# Altium PCB APM32F103VET6核心板PCB图纸.PcbDoc
Units mil, origin at the board's own origin, x right, y up, seen from the top; angles counter-clockwise.
Board outline 2600 x 1600 mil, 2 copper layers (Top Layer, Bottom Layer); 35 components, 94 nets, 269 pads, 0 vias.
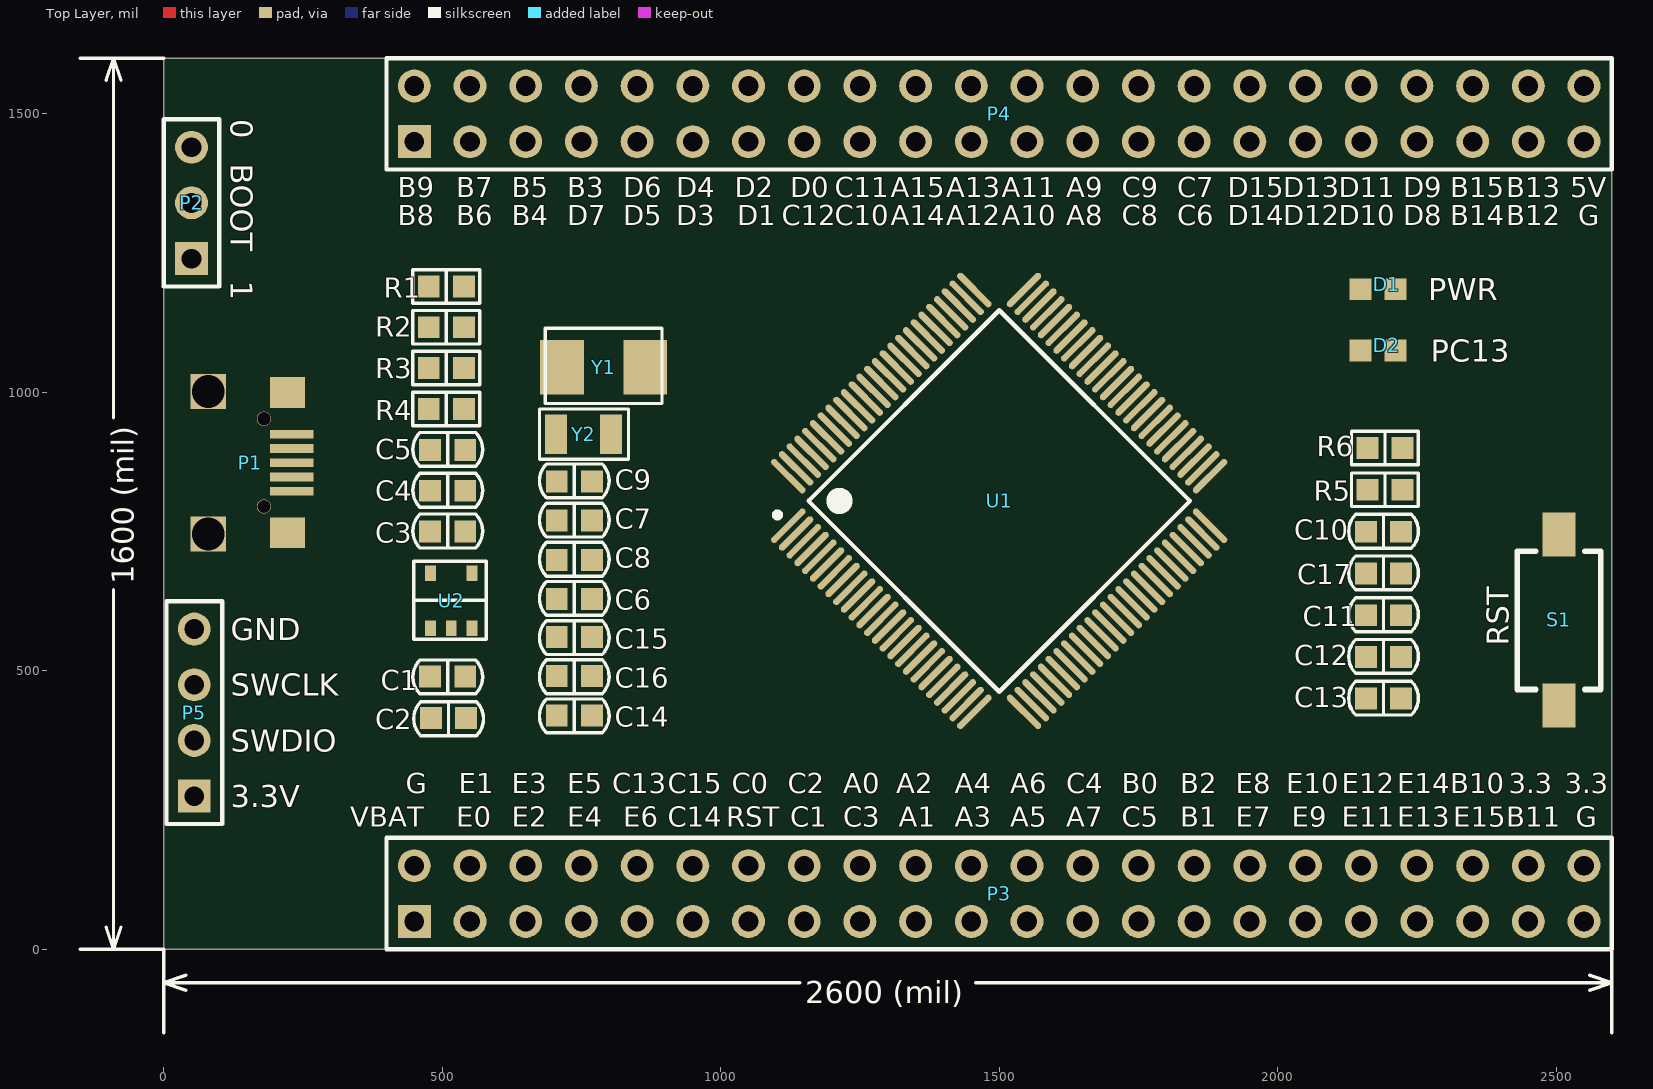
[diagram p0: Top Layer view]
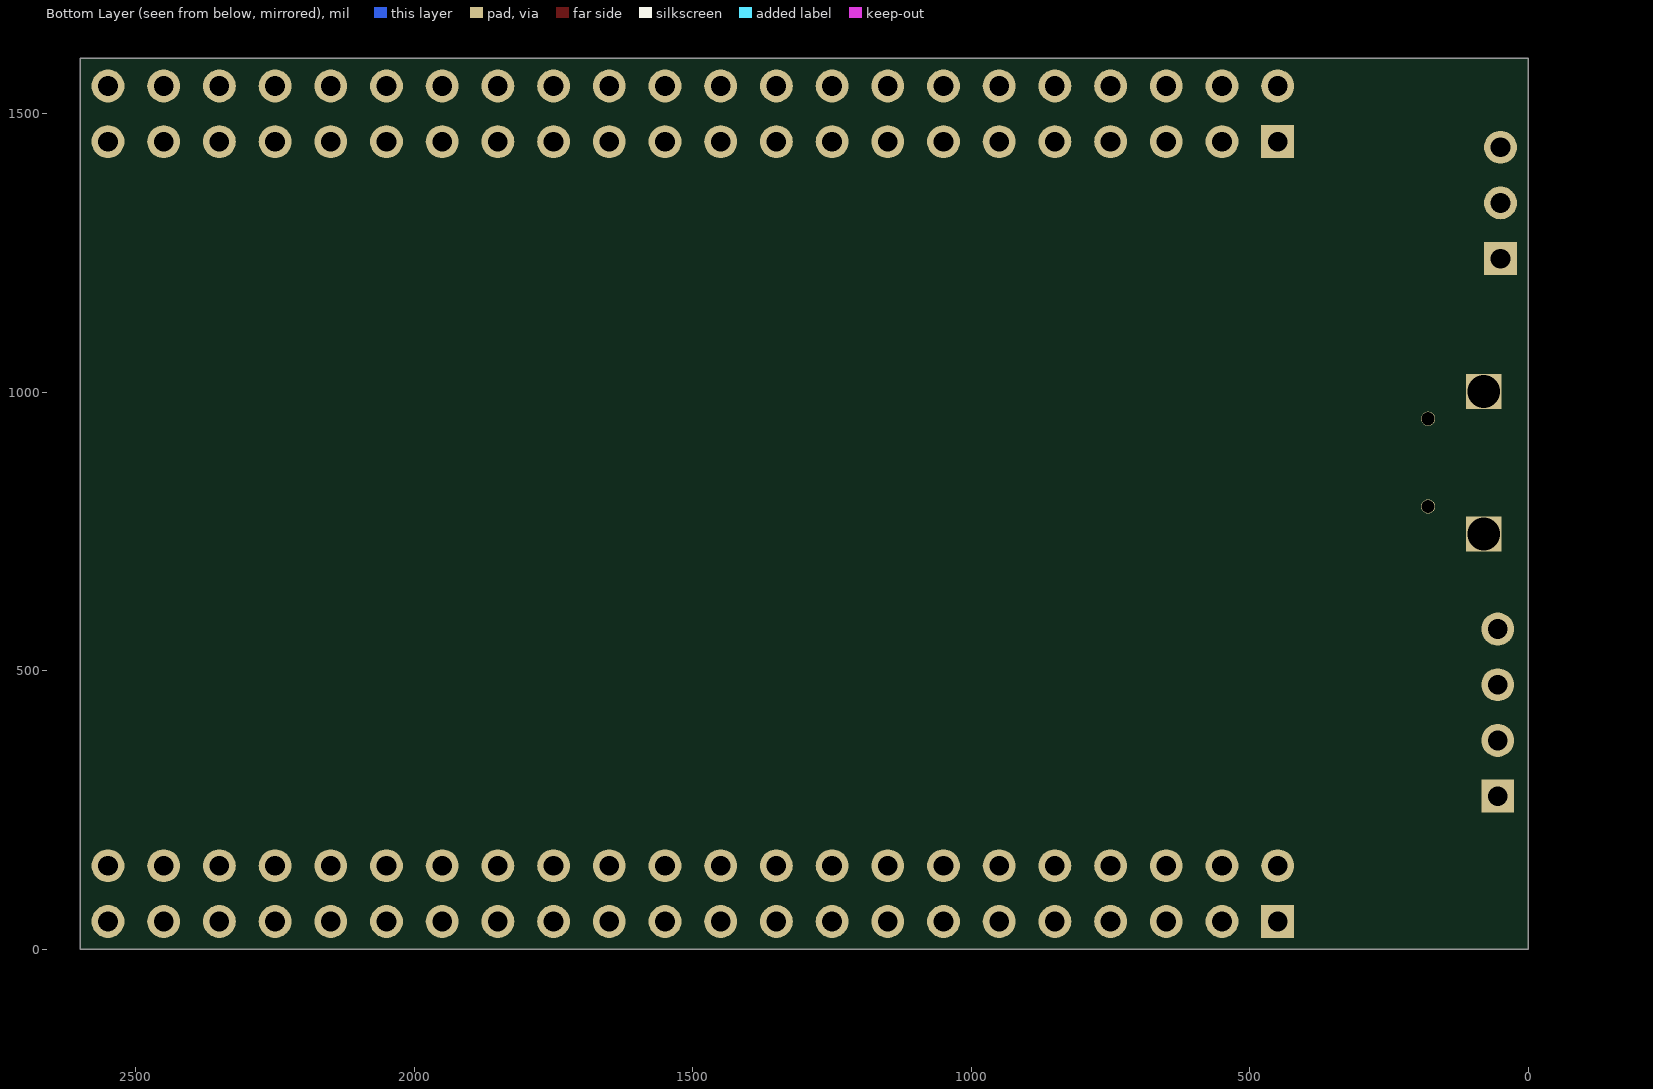
[diagram p1: Bottom Layer view, seen from below]

## Layer stack, top to bottom
Top Solder: solder mask 0.4, Solder Resist, Dk 3.5
Top Layer: signal copper 1.4
Dielectric 1: dielectric 12.6, FR-4, Dk 4.8
Bottom Layer: signal copper 1.4
Bottom Solder: solder mask 0.4, Solder Resist, Dk 3.5

## Board outline
0,0 2600,0 2600,1600 0,1600

## Design rules (kind name [scope] priority, off if disabled: settings)
Clearance [All] p1: gap=6
PolygonConnect [All] p1: connectstyle=Relief reliefconductorwidth=10 reliefentries=4 polygonreliefangle="90 Angle" airgapwidth=10
RoutingVias [All] p1: holewidth=28 width=50 viastyle="Through Hole" minholewidth=28 minwidth=50 maxholewidth=28 maxwidth=50
SolderMaskExpansion [All] p1: expansion=4
Width [All] p1: maxlimit=20 minlimit=10 preferedwidth=10
30 further rules are at their usual default settings.

## Components (designator, comment, footprint, x,y, rotation, side; value= is the part's Value field where it differs from the comment)
C1 "Cap 0603" R0603-R/C-Y 510,490 r180 top
C2 "Cap 0603" R0603-R/C-Y 511.5,415 r180 top
C3 "Cap 0603" R0603-R/C-Y 510,750 r0 top
C4 "Cap 0603" R0603-R/C-Y 510,823.24 r0 top
C5 "Cap 0603" R0603-R/C-Y 510,896.48 r0 top
C6 "Cap 0603" R0603-R/C-Y 737.24,629 r0 top
C7 "Cap 0603" R0603-R/C-Y 737.24,769.67 r0 top
C8 "Cap 0603" R0603-R/C-Y 737.24,699.33 r0 top
C9 "Cap 0603" R0603-R/C-Y 737.24,840 r0 top
C10 "Cap 0603" R0603-R/C-Y 2190,749.62 r0 top
C11 "Cap 0603" R0603-R/C-Y 2190,599.81 r0 top
C12 "Cap 0603" R0603-R/C-Y 2190,524.91 r0 top
C13 "Cap 0603" R0603-R/C-Y 2190,450 r0 top
C14 "Cap 0603" R0603-R/C-Y 737.24,420 r180 top
C15 "Cap 0603" R0603-R/C-Y 737.24,560.67 r180 top
C16 "Cap 0603" R0603-R/C-Y 737.24,490.33 r180 top
C17 "Cap 0603" R0603-R/C-Y 2190,674.72 r0 top
D1 "LED 0603" 0603-LED-G 2180,1185 r0 top
D2 "LED 0603" 0603-LED-G 2180,1075 r0 top
P1 "USB-Micro" "USB Micro" 230,873.74 r90 top
P2 "Header 3" HDR1X3 50,1240 r90 top
P3 "Header 22X2" HDR2X22 450,50 r0 top
P4 "Header 22X2" HDR2X22 450,1450 r0 top
P5 "Header 4" HDR1X4 55,275 r90 top
R1 "Res 0603" R0603-R/C-BY 507.39,1190 r180 top
R2 "Res 0603" R0603-R/C-BY 507.39,1116.76 r0 top
R3 "Res 0603" R0603-R/C-BY 507.39,1043.52 r0 top
R4 "Res 0603" R0603-R/C-BY 507.39,970.28 r180 top
R5 "Res 0603" R0603-R/C-BY 2192.61,825.09 r0 top
R6 "Res 0603" R0603-R/C-BY 2192.61,900 r0 top
S1 "SW_PB" SW-2Pin 2505,437.91 r90 top
U1 "STM32F103VBT6" LQFP100_M 1500,805 r45 top
U2 "ME6211C33M5G SOT-23-5" SOT-23-5 478.89,576.57 r0 top
Y1 "XTAL 8MHz 5032" "XTAL 5032" 789.8,1045 r0 top
Y2 "XTAL_32.768K 3215" "XTAL 3215" 704.63,925 r0 top

## Footprints (in the part's own frame and the unit in brackets; to place one, negate y for a bottom-side part, rotate by r counter-clockwise, add the part's x,y. Pads: shape width x height; smd on the part's side, far side on the other; paste and mask are expansions set on the pad)
0603-LED-G [mm]
  rect 1x1 smd: 1(-0.8,0) 2(0.8,0)
  round 0.2 on Top Overlay mask+0: 2(1.587,0.463)
  body extent -0.8,-0.39 0.85,0.33, height 0.68
HDR1X3 [mm] "Connector; Header; 3 Position"
  rect 1.5x1.5 hole 0.9: 1(0,0)
  round 1.5 hole 0.9: 2(2.54,0) 3(5.08,0)
  silkscreen extent -1.27,-1.27 6.35,1.27
HDR1X4 [mm] "Connector; Header; 4 Position"
  rect 1.5x1.5 hole 0.9: 1(0,0)
  round 1.5 hole 0.9: 2(2.54,0) 3(5.08,0) 4(7.62,0)
  silkscreen extent -1.27,-1.27 8.89,1.27
HDR2X22 [mm] "Connector; Header; 22x2 Position"
  rect 1.5x1.5 hole 0.9: 1(0,0)
  round 1.5 hole 0.9: 2(0,2.54) 3(2.54,0) 4(2.54,2.54) 5(5.08,0) 6(5.08,2.54) 7(7.62,0) 8(7.62,2.54) 9(10.16,0) 10(10.16,2.54) 11(12.7,0) 12(12.7,2.54) 13(15.24,0) 14(15.24,2.54) 15(17.78,0) 16(17.78,2.54) 17(20.32,0) 18(20.32,2.54) 19(22.86,0) 20(22.86,2.54) 21(25.4,0) 22(25.4,2.54) 23(27.94,0) 24(27.94,2.54) 25(30.48,0) 26(30.48,2.54) 27(33.02,0) 28(33.02,2.54) 29(35.56,0) 30(35.56,2.54) 31(38.1,0) 32(38.1,2.54) 33(40.64,0) 34(40.64,2.54) 35(43.18,0) 36(43.18,2.54) 37(45.72,0) 38(45.72,2.54) 39(48.26,0) 40(48.26,2.54) 41(50.8,0) 42(50.8,2.54) 43(53.34,0) 44(53.34,2.54)
  silkscreen extent -1.27,-1.27 54.61,3.81
LQFP100_M [mm] "Thin QFP, 100-Leads, Body 14x14mm, Pitch 0.5mm, IPC Low Density"
  oval 2.1x0.3 smd: 1(-7.6,6) 2(-7.6,5.5) 3(-7.6,5) 4(-7.6,4.5) 5(-7.6,4) 6(-7.6,3.5) 7(-7.6,3) 8(-7.6,2.5) 9(-7.6,2) 10(-7.6,1.5) 11(-7.6,1) 12(-7.6,0.5) 13(-7.6,0) 14(-7.6,-0.5) 15(-7.6,-1) 16(-7.6,-1.5) 17(-7.6,-2) 18(-7.6,-2.5) 19(-7.6,-3) 20(-7.6,-3.5) 21(-7.6,-4) 22(-7.6,-4.5) 23(-7.6,-5) 24(-7.6,-5.5) 25(-7.6,-6) 51(7.6,-6) 52(7.6,-5.5) 53(7.6,-5) 54(7.6,-4.5) 55(7.6,-4) 56(7.6,-3.5) 57(7.6,-3) 58(7.6,-2.5) 59(7.6,-2) 60(7.6,-1.5) 61(7.6,-1) 62(7.6,-0.5) 63(7.6,0) 64(7.6,0.5) 65(7.6,1) 66(7.6,1.5) 67(7.6,2) 68(7.6,2.5) 69(7.6,3) 70(7.6,3.5) 71(7.6,4) 72(7.6,4.5) 73(7.6,5) 74(7.6,5.5) 75(7.6,6)
  oval 0.3x2.1 smd: 26(-6,-7.6) 27(-5.5,-7.6) 28(-5,-7.6) 29(-4.5,-7.6) 30(-4,-7.6) 31(-3.5,-7.6) 32(-3,-7.6) 33(-2.5,-7.6) 34(-2,-7.6) 35(-1.5,-7.6) 36(-1,-7.6) 37(-0.5,-7.6) 38(0,-7.6) 39(0.5,-7.6) 40(1,-7.6) 41(1.5,-7.6) 42(2,-7.6) 43(2.5,-7.6) 44(3,-7.6) 45(3.5,-7.6) 46(4,-7.6) 47(4.5,-7.6) 48(5,-7.6) 49(5.5,-7.6) 50(6,-7.6) 76(6,7.6) 77(5.5,7.6) 78(5,7.6) 79(4.5,7.6) 80(4,7.6) 81(3.5,7.6) 82(3,7.6) 83(2.5,7.6) 84(2,7.6) 85(1.5,7.6) 86(1,7.6) 87(0.5,7.6) 88(0,7.6) 89(-0.5,7.6) 90(-1,7.6) 91(-1.5,7.6) 92(-2,7.6) 93(-2.5,7.6) 94(-3,7.6) 95(-3.5,7.6) 96(-4,7.6) 97(-4.5,7.6) 98(-5,7.6) 99(-5.5,7.6) 100(-6,7.6)
  silkscreen extent -7.72,-6.15 6.15,6.82, body extent -7,-7 7,7, height 1.6
R0603-R/C-BY [mm]
  rect 1x1 smd: 1(-0.8,0) 2(0.8,0)
  silkscreen extent -1.52,-0.76 1.52,0.76, body extent -0.97,-0.36 1.03,0.43, height 0.79
R0603-R/C-Y [mm]
  rect 1x1 smd: 1(-0.8,0) 2(0.8,0)
  silkscreen extent -1.59,-0.75 1.59,0.8, body extent -0.97,-0.36 1.03,0.43, height 0.79
SOT-23-5 [mm]
  rect 0.5x0.7 smd: 1(0,0) 2(0.95,0) 3(1.9,0) 4(1.9,2.5) 5(0,2.5)
  silkscreen extent -0.76,-0.51 2.54,3.05, body extent -0.61,0.02 2.39,2.52, height 1.05
SW-2Pin [mm]
  rect 2x1.5 smd: 1(0,0) 2(7.8,0)
  silkscreen extent 0.73,-1.9 7.03,1.9, body extent -0.06,-1.94 7.83,1.91, height 2.5
"USB Micro" [mm]
  rect 0.4x2 smd: 1(-1.3,0) 2(-0.65,0) 3(0,0) 4(0.65,0) 5(1.3,0)
  rect 1.6x1.6 hole 1.5: ""(-3.25,3.81) ""(3.25,3.81)
  rect 1.4x1.6 smd: ""(-3.2,0.2) ""(3.2,0.2)
  round 0.65 hole 0.6 unplated: ""(-2,1.27) ""(2,1.27)
  body extent -4.4,0.13 4.4,5.73, height 2.83
"XTAL 3215" [mm]
  rect 1x1.8 smd: 1(0,0) 2(2.5,0)
  silkscreen extent -0.76,-1.14 3.3,1.14, body extent -0.33,-0.75 2.87,0.75, height 0.8
"XTAL 5032" [mm]
  rect 2x2.5 smd: 1(-1.9,0) 2(1.9,0)
  silkscreen extent -2.67,-1.65 2.67,1.78, body extent -2.5,-1.55 2.5,1.65, height 1.2

## Part data
C1 C2 C3 C4 C5 C6 C7 C8 C9 C10 C11 C12 C13 C14 C15 C16 C17: "Capacitor 0603"
P2: "Header, 3-Pin"
P3 P4: "Header, 22-Pin, Dual row"
P5: "Header, 4-Pin"
R1 R2 R3 R4 R5 R6: "Resistor 0603"
U1: "STM32 ARM-based 32-bit MCU with 64 Kbytes Flash, 100-pin LQFP, Industrial Temperature"
U2: library part ME6211C33M5G
Y1: library part "XTAL 8MHZ", "XTAL 8MHZ"

## Nets (pads, with @x,y where several pads share a name; then routed paths per layer and width w, separated by ;. In a path a pad name is that pad's centre, name@x,y a point inside that pad or via, vN(x,y) a via of type N, cw(c..) or ccw(c..) an arc to the next point about the centre after c; other vN are vias at no path point)
BOOT0: 
GND: 
NetC3_2: 
NetD1_1: 
NetD2_1: 
NetP1_3: 
NetP1_4: 
NetP2_2: 
OSC32_IN: 
OSC32_OUT: 
OSC_IN: 
OSC_OUT: 
PA0: 
PA1: 
PA2: 
PA3: 
PA4: 
PA5: 
PA6: 
PA7: 
PA8: 
PA9: 
PA10: 
PA11: 
PA12: 
PA13: 
PA14: 
PA15: 
PB0: 
PB1: 
PB2: 
PB3: 
PB4: 
PB5: 
PB6: 
PB7: 
PB8: 
PB9: 
PB10: 
PB11: 
PB12: 
PB13: 
PB14: 
PB15: 
PC0: 
PC1: 
PC2: 
PC3: 
PC4: 
PC5: 
PC6: 
PC7: 
PC8: 
PC9: 
PC10: 
PC11: 
PC12: 
PC13: 
PD0: 
PD1: 
PD2: 
PD3: 
PD4: 
PD5: 
PD6: 
PD7: 
PD8: 
PD9: 
PD10: 
PD11: 
PD12: 
PD13: 
PD14: 
PD15: 
PE0: 
PE1: 
PE2: 
PE3: 
PE4: 
PE5: 
PE6: 
PE7: 
PE8: 
PE9: 
PE10: 
PE11: 
PE12: 
PE13: 
PE14: 
PE15: 
RST: 
VBAT: 
VCC_3V3: 
VCC_5V: 
pads on no net: C1.1 C1.2 C2.1 C2.2 C3.1 C3.2 C4.1 C4.2 C5.1 C5.2 C6.1 C6.2 C7.1 C7.2 C8.1 C8.2 C9.1 C9.2 C10.1 C10.2 C11.1 C11.2 C12.1 C12.2 C13.1 C13.2 C14.1 C14.2 C15.1 C15.2 C16.1 C16.2 C17.1 C17.2 D1.1 D1.2 D2.1 D2.2 P1. P1.1 P1.2 P1.3 P1.4 P1.5 P2.1 P2.2 P2.3 P3.1 P3.2 P3.3 P3.4 P3.5 P3.6 P3.7 P3.8 P3.9 P3.10 P3.11 P3.12 P3.13 P3.14 P3.15 P3.16 P3.17 P3.18 P3.19 P3.20 P3.21 P3.22 P3.23 P3.24 P3.25 P3.26 P3.27 P3.28 P3.29 P3.30 P3.31 P3.32 P3.33 P3.34 P3.35 P3.36 P3.37 P3.38 P3.39 P3.40 P3.41 P3.42 P3.43 P3.44 P4.1 P4.2 P4.3 P4.4 P4.5 P4.6 P4.7 P4.8 P4.9 P4.10 P4.11 P4.12 P4.13 P4.14 P4.15 P4.16 P4.17 P4.18 P4.19 P4.20 P4.21 P4.22 P4.23 P4.24 P4.25 P4.26 P4.27 P4.28 P4.29 P4.30 P4.31 P4.32 P4.33 P4.34 P4.35 P4.36 P4.37 P4.38 P4.39 P4.40 P4.41 P4.42 P4.43 P4.44 P5.1 P5.2 P5.3 P5.4 R1.1 R1.2 R2.1 R2.2 R3.1 R3.2 R4.1 R4.2 R5.1 R5.2 R6.1 R6.2 S1.1 S1.2 U1.1 U1.2 U1.3 U1.4 U1.5 U1.6 U1.7 U1.8 U1.9 U1.10 U1.11 U1.12 U1.13 U1.14 U1.15 U1.16 U1.17 U1.18 U1.19 U1.20 U1.21 U1.22 U1.23 U1.24 U1.25 U1.26 U1.27 U1.28 U1.29 U1.30 U1.31 U1.32 U1.33 U1.34 U1.35 U1.36 U1.37 U1.38 U1.39 U1.40 U1.41 U1.42 U1.43 U1.44 U1.45 U1.46 U1.47 U1.48 U1.49 U1.50 U1.51 U1.52 U1.53 U1.54 U1.55 U1.56 U1.57 U1.58 U1.59 U1.60 U1.61 U1.62 U1.63 U1.64 U1.65 U1.66 U1.67 U1.68 U1.69 U1.70 U1.71 U1.72 U1.73 U1.74 U1.75 U1.76 U1.77 U1.78 U1.79 U1.80 U1.81 U1.82 U1.83 U1.84 U1.85 U1.86 U1.87 U1.88 U1.89 U1.90 U1.91 U1.92 U1.93 U1.94 U1.95 U1.96 U1.97 U1.98 U1.99 U1.100 U2.1 U2.2 U2.3 U2.4 U2.5 Y1.1 Y1.2 Y2.1 Y2.2

## Silkscreen, mask and mechanical layers (free items; w line width, h text height)
Top Overlay:
  lines w6: -150,0 0,0 0,-150 ; -150,1600 0,1600 ; -103.33,40 -90,0 ; -103.33,1560 -90,1600 ; -96,0 -84,0 ; -96,1600 -84,1600 ; -90,645.36 -90,0 ; -90,954.64 -90,1600 ; -76.67,40 -90,0 ; -76.67,1560 -90,1600 ; 0,-66 0,-54 ; 40,-73.33 0,-60 ; 40,-46.67 0,-60 ; 1142.22,-60 0,-60 ; 1457.78,-60 2600,-60 ; 2560,-73.33 2600,-60 ; 2560,-46.67 2600,-60 ; 2600,-150 2600,0 ; 2600,-66 2600,-54
  text "0" at 120,1490 h40 r270
  text "BOOT" at 120,1410 h40 r270
  text "B9" at 420,1350 h36
  text "B7" at 525,1350 h36
  text "B5" at 625,1350 h36
  text "B3" at 725,1350 h36
  text "D6" at 825,1350 h36
  text "D4" at 920,1350 h36
  text "D2" at 1025,1350 h36
  text "D0" at 1125,1350 h36
  text "C11" at 1205,1350 h36
  text "A15" at 1305,1350 h36
  text "A13" at 1405,1350 h36
  text "A11" at 1505,1350 h36
  text "A9" at 1620,1350 h36
  text "C9" at 1720,1350 h36
  text "C7" at 1820,1350 h36
  text "D15" at 1910,1350 h36
  text "D13" at 2010,1350 h36
  text "D11" at 2110,1350 h36
  text "D9" at 2225,1350 h36
  text "B15" at 2310,1350 h36
  text "B13" at 2410,1350 h36
  text "5V" at 2525,1350 h36
  text "B8" at 420,1300 h36
  text "B6" at 525,1300 h36
  text "B4" at 625,1300 h36
  text "D7" at 725,1300 h36
  text "D5" at 825,1300 h36
  text "D3" at 920,1300 h36
  text "D1" at 1030,1300 h36
  text "C12" at 1110,1300 h36
  text "C10" at 1205,1300 h36
  text "A14" at 1305,1300 h36
  text "A12" at 1405,1300 h36
  text "A10" at 1505,1300 h36
  text "A8" at 1620,1300 h36
  text "C8" at 1720,1300 h36
  text "C6" at 1820,1300 h36
  text "D14" at 1910,1300 h36
  text "D12" at 2010,1300 h36
  text "D10" at 2110,1300 h36
  text "D8" at 2225,1300 h36
  text "B14" at 2310,1300 h36
  text "B12" at 2410,1300 h36
  text "G" at 2540,1300 h36
  text "1" at 120,1200 h40 r270
  text "PWR" at 2270,1165 h40
  text "PC13" at 2275,1055 h40
  text "1600 (mil)" at -53.53,655.36 h40 r90
  text "GND" at 120,555 h40
  text "RST" at 2415,545 h40 r90
  text "SWCLK" at 120,455 h40
  text "SWDIO" at 120,355 h40
  text "G" at 435,280 h36
  text "E1" at 530,280 h36
  text "E3" at 625,280 h36
  text "E5" at 725,280 h36
  text "C13" at 805,280 h36
  text "C15" at 905,280 h36
  text "C0" at 1020,280 h36
  text "C2" at 1120,280 h36
  text "A0" at 1220,280 h36
  text "A2" at 1315,280 h36
  text "A4" at 1420,280 h36
  text "A6" at 1520,280 h36
  text "C4" at 1620,280 h36
  text "B0" at 1720,280 h36
  text "B2" at 1825,280 h36
  text "E8" at 1925,280 h36
  text "E10" at 2015,280 h36
  text "E12" at 2115,280 h36
  text "E14" at 2215,280 h36
  text "B10" at 2310,280 h36
  text "3.3" at 2415,280 h36
  text "3.3" at 2515,280 h36
  text "3.3V" at 120,255 h40
  text "VBAT" at 335,220 h36
  text "E0" at 525,220 h36
  text "E2" at 625,220 h36
  text "E4" at 725,220 h36
  text "E6" at 825,220 h36
  text "C14" at 905,220 h36
  text "RST" at 1010,220 h36
  text "C1" at 1125,220 h36
  text "C3" at 1220,220 h36
  text "A1" at 1320,220 h36
  text "A3" at 1420,220 h36
  text "A5" at 1520,220 h36
  text "A7" at 1620,220 h36
  text "C5" at 1720,220 h36
  text "B1" at 1825,220 h36
  text "E7" at 1925,220 h36
  text "E9" at 2025,220 h36
  text "E11" at 2115,220 h36
  text "E13" at 2215,220 h36
  text "E15" at 2315,220 h36
  text "B11" at 2410,220 h36
  text "G" at 2535,220 h36
  text "2600 (mil)" at 1152.22,-96.47 h40
Mechanical 1:
  the board outline again, w6